# EAGLE board MEDUSA_Light (EAGLE 9.6.2)
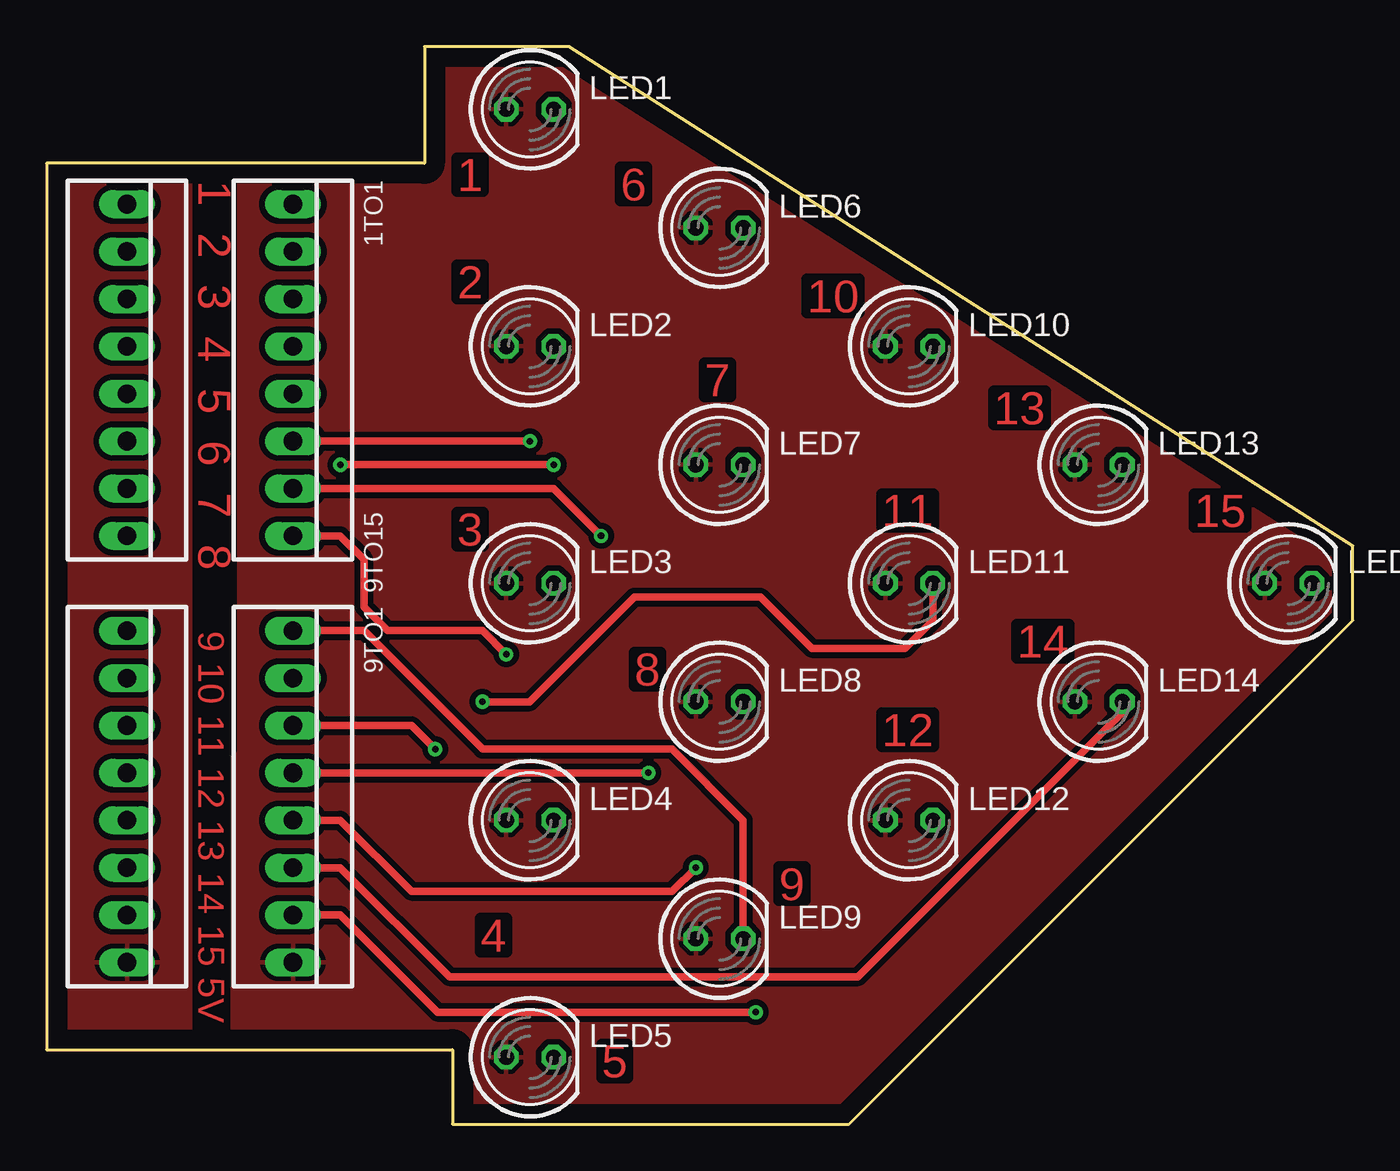
[diagram p0: board, top side]
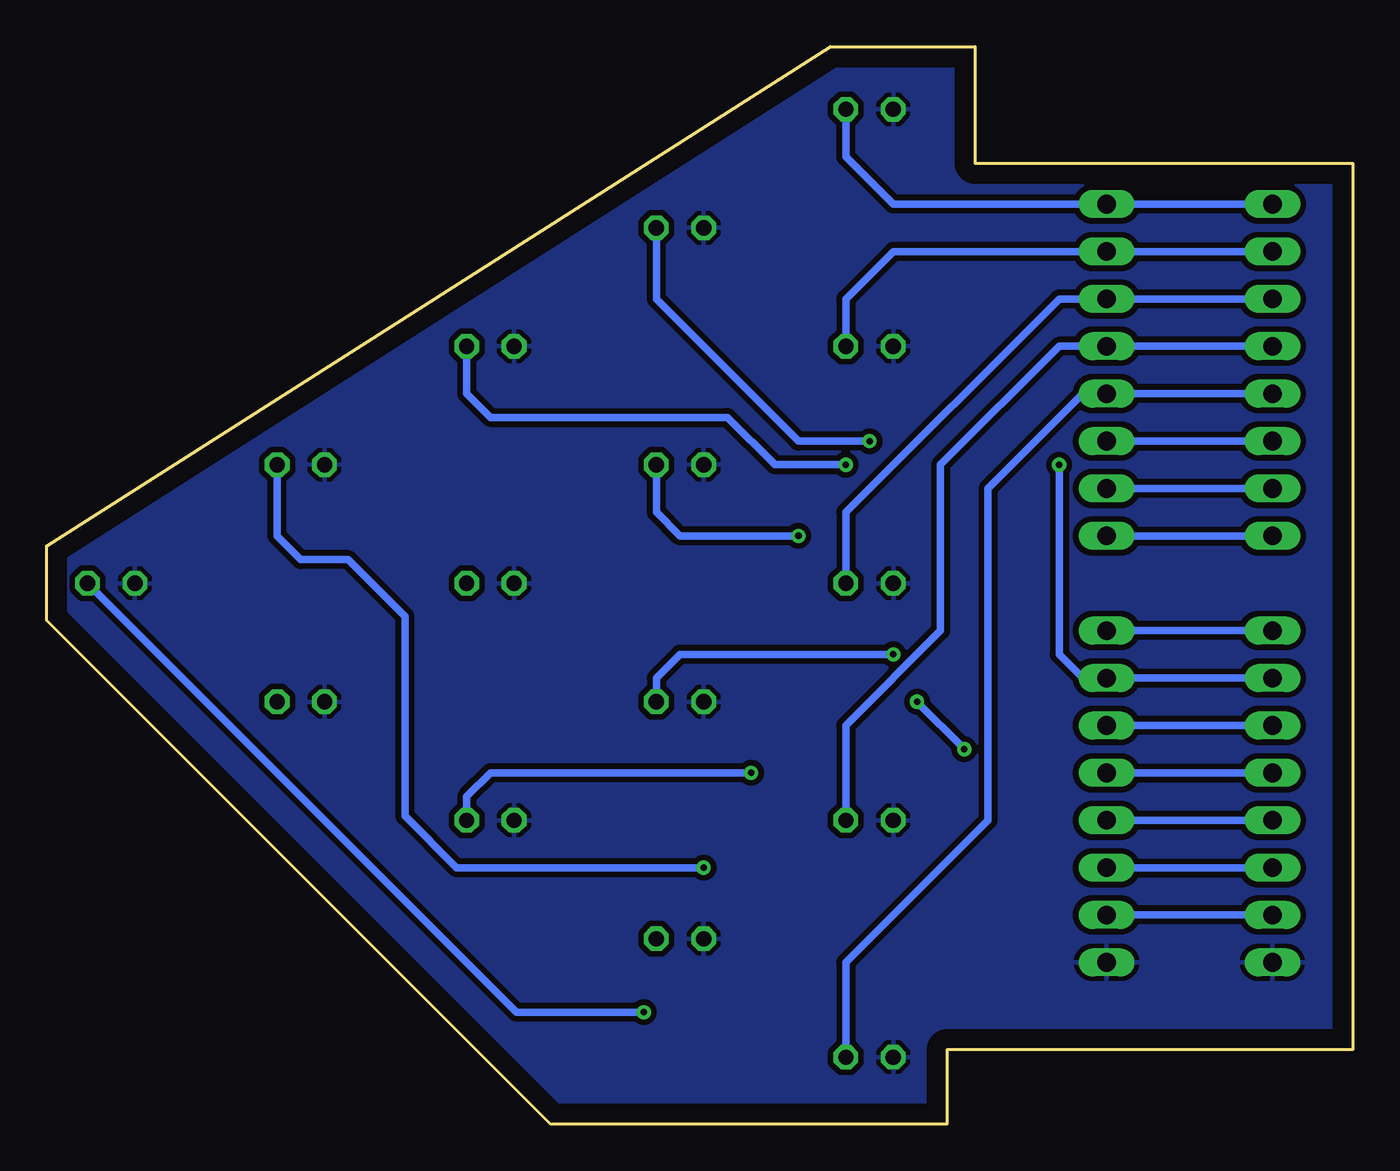
[diagram p1: board, bottom side, seen from below]

Size 70 x 57.75 mm. Coordinates in mm from the lower left corner, seen from the top.
Outline: 0,4 21.75,4 21.75,0 43,0 70,27 70,31 28,57.75 20.25,57.75 20.25,51.5 0,51.5 0,4
Copper layers (1*16): Top 0.035mm / dielectric 1.5mm / Bottom 0.035mm
Design rules "default *": minimum track width 6mil, minimum drill 0.35mm, track to track 12mil, track to pad 12mil, pad to pad 12mil, via to via 12mil, smd to smd 12mil, copper to edge 40mil, drill to drill 6mil, minimum pad ring 10mil, minimum via ring 8mil, stop-mask expansion 4mil, vias tented up to drill 0mil, thermal gap 10mil

## Footprints (pad centres in the part's own frame; a part is rotated, then mirrored left to right if it is on the bottom)
22-23-2081 = drill 1 long: 1 -8.89,0; 2 -6.35,0; 3 -3.81,0; 4 -1.27,0; 5 1.27,0; 6 3.81,0; 7 6.35,0; 8 8.89,0
LED5MM = drill 0.813 octagon: A -1.27,0; K 1.27,0

## Placement (x,y rotation side)
1TO1  22-23-2081  [22-23-2081]  13.2,40.42 270 top
1TO8  22-23-2081  [22-23-2081]  4.31,40.42 270 top
9TO1  22-23-2081  [22-23-2081]  13.2,17.56 270 top
9TO15  22-23-2081  [22-23-2081]  4.31,17.56 270 top
LED1  [LED5MM]  25.9,54.39 0 top
LED2  [LED5MM]  25.9,41.69 0 top
LED3  [LED5MM]  25.9,28.99 0 top
LED4  [LED5MM]  25.9,16.29 0 top
LED5  [LED5MM]  25.9,3.59 0 top
LED6  [LED5MM]  36.06,48.04 0 top
LED7  [LED5MM]  36.06,35.34 0 top
LED8  [LED5MM]  36.06,22.64 0 top
LED9  [LED5MM]  36.06,9.94 0 top
LED10  [LED5MM]  46.22,41.69 0 top
LED11  [LED5MM]  46.22,28.99 0 top
LED12  [LED5MM]  46.22,16.29 0 top
LED13  [LED5MM]  56.38,35.34 0 top
LED14  [LED5MM]  56.38,22.64 0 top
LED15  [LED5MM]  66.54,28.99 0 top

## Library data of the parts
1TO1 1TO8 9TO1 9TO15 = con-molex; MF: MOLEX; MPN: 22-23-2081; OC_FARNELL: 1756826; OC_NEWARK: 01C7592
LED1-LED15 = led

## Nets
5VLED: 9TO1.8 9TO15.8 LED1.A LED2.A LED3.A LED4.A LED5.A LED6.A LED7.A LED8.A LED9.A LED10.A LED11.A LED12.A LED13.A LED14.A LED15.A
L1: 1TO1.1 1TO8.1 LED1.K
L2: 1TO1.2 1TO8.2 LED2.K
L3: 1TO1.3 1TO8.3 LED3.K
L4: 1TO1.4 1TO8.4 LED4.K
L5: 1TO1.5 1TO8.5 LED5.K
L6: 1TO1.6 1TO8.6 LED6.K
L7: 1TO1.7 1TO8.7 LED7.K
L8: 1TO1.8 1TO8.8 LED8.K
L9: 9TO1.1 9TO15.1 LED9.K
L10: 9TO1.2 9TO15.2 LED10.K
L11: 9TO1.3 9TO15.3 LED11.K
L12: 9TO1.4 9TO15.4 LED12.K
L13: 9TO1.5 9TO15.5 LED13.K
L14: 9TO1.6 9TO15.6 LED14.K
L15: 9TO1.7 9TO15.7 LED15.K

## Tracks (layer width: path | path; a pad name or v marks a point on that pad's centre or on a via)
5VLED
  pour Top: 0,4 21.75,4 21.75,1.5 21.75,0 38,0 43,0 70,27 70,31 28,57.75 20.25,57.75 20.25,51.5 0,51.5
  pour Bottom: 0,4 21.75,4 21.75,0 43,0 70,27 70,31 28,57.75 20.25,57.75 20.25,51.5 0,51.5
L1
  Bottom 0.406: 1TO8.1 1TO1.1 24.63,49.31 27.17,51.85 LED1.K
L2
  Bottom 0.406: 1TO8.2 1TO1.2 24.63,46.77 27.17,44.23 LED2.K
L3
  Bottom 0.406: 1TO8.3 1TO1.3 15.74,44.23 27.17,32.8 LED3.K
L4
  Bottom 0.406: 1TO8.4 1TO1.4 15.74,41.69 22.09,35.34 22.09,26.45 27.17,21.37 LED4.K
L5
  Bottom 0.406: 1TO8.5 1TO1.5 14.47,39.15 19.55,34.07 19.55,16.29 27.17,8.67 LED5.K
L6  (via drill 0.35)
  Top 0.406: 1TO1.6 v25.9,36.61
  Bottom 0.406: 1TO1.6 1TO8.6 | v25.9,36.61 29.71,36.61 37.33,44.23 LED6.K
L7  (via drill 0.35)
  Top 0.406: 1TO1.7 27.17,34.07 v29.71,31.53
  Bottom 0.406: 1TO8.7 1TO1.7 | v29.71,31.53 36.06,31.53 37.33,32.8 LED7.K
L8  (via drill 0.35)
  Top 0.406: 14.47,31.53 1TO1.8 15.74,31.53 17.01,30.26 17.01,27.72 18.28,26.45 23.36,26.45 v24.63,25.18
  Bottom 0.406: 1TO1.8 1TO8.8 | v24.63,25.18 36.06,25.18 37.33,23.91 LED8.K
L9
  Top 0.406: 9TO1.1 17.01,26.45 23.36,20.1 33.52,20.1 37.33,16.29 LED9.K
  Bottom 0.406: 9TO15.1 9TO1.1
L10  (via drill 0.35)
  Top 0.406: v27.17,35.34 v15.74,35.34
  Bottom 0.406: 9TO15.2 9TO1.2 14.47,23.91 15.74,25.18 v15.74,35.34 | LED10.K 47.49,39.15 46.22,37.88 33.52,37.88 30.98,35.34 v27.17,35.34
L11  (via drill 0.35)
  Top 0.406: 9TO1.3 19.55,21.37 v20.82,20.1 | v23.36,22.64 25.89,22.64 31.5,28.25 38.25,28.25 41,25.5 46,25.5 47.5,27 LED11.K
  Bottom 0.406: 9TO15.3 9TO1.3 | v20.82,20.1 v23.36,22.64
L12  (via drill 0.35)
  Top 0.406: 9TO1.4 v32.25,18.83
  Bottom 0.406: 9TO1.4 9TO15.4 | v32.25,18.83 46.22,18.83 47.49,17.56 LED12.K
L13  (via drill 0.35)
  Top 0.406: 9TO1.5 15.74,16.29 19.55,12.48 33.52,12.48 v34.79,13.75
  Bottom 0.406: 9TO15.5 9TO1.5 | v34.79,13.75 48.03,13.75 50.8,16.52 50.8,27.22 53.84,30.26 56.38,30.26 57.65,31.53 LED13.K
L14
  Top 0.406: 9TO1.6 15.74,13.75 21.59,7.9 43.49,7.9 57.65,22.06 LED14.K
  Bottom 0.406: 9TO1.6 9TO15.6
L15  (via drill 0.35)
  Top 0.406: 9TO1.7 15.74,11.21 20.95,6 v38,6
  Bottom 0.406: 9TO15.7 9TO1.7 | v38,6 44.82,6 LED15.K

## Text on the board
Top: 1 2 3 4 5 6 7 8 | 1 | 6 | 2 | 10 | 7 | 13 | 11 | 15 | 3 | 9 10 11 12 13 14 15 5V | 14 | 8 | 12 | 9 | 4 | 5